# EAGLE board nrf52840_four_input_minew_module_v01 (EAGLE 7.7.0)
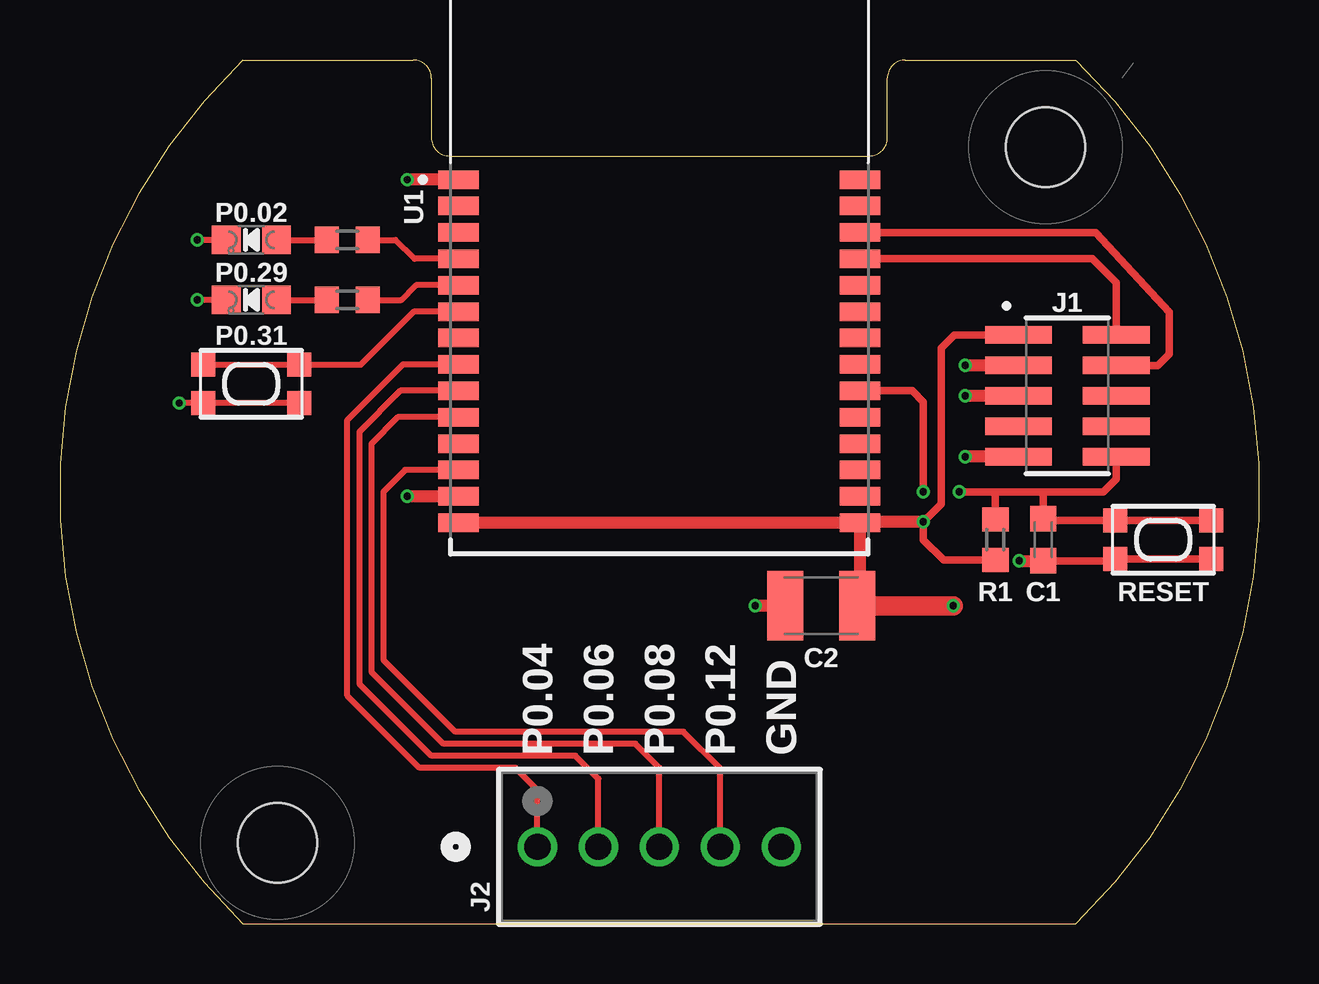
[diagram p0: board, top side]
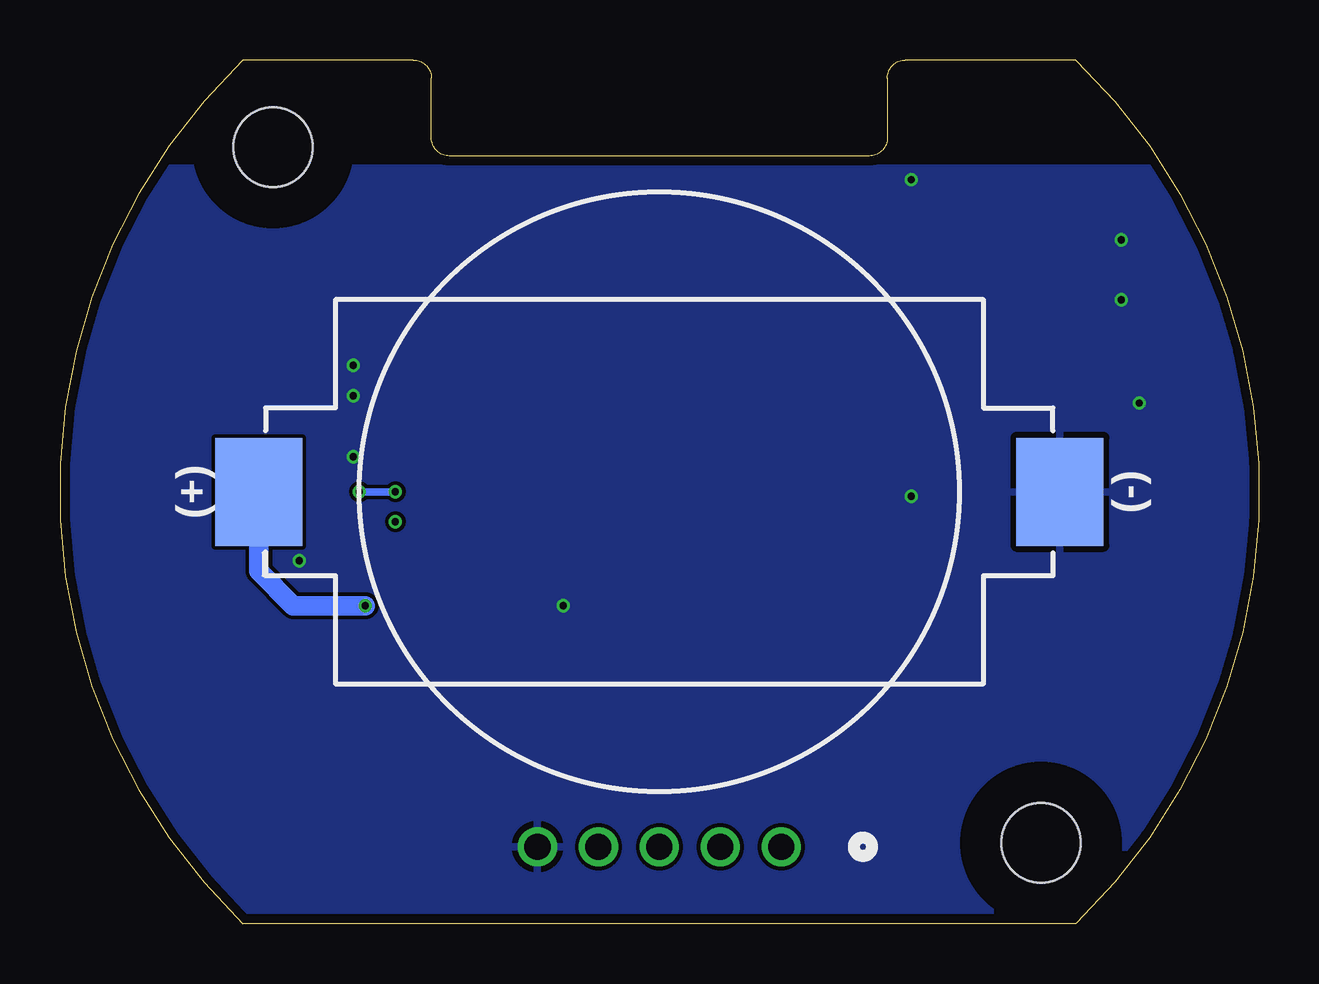
[diagram p1: board, bottom side, seen from below]

Size 49.94 x 36 mm. Coordinates in mm from the lower left corner, seen from the top.
Outline: 7.62,36 14.72,36 arc-90 15.47,35.25 15.47,32.75 arc90 16.22,32 33.72,32 arc90 34.47,32.75 34.47,35.25 arc-90 35.22,36 42.32,36 arc-92 42.32,0 7.62,0 arc-92 7.62,36
Copper layers (1*16): Top 0.035559375mm / dielectric 1.6mm / Bottom 0.035559375mm
Design rules "oshpark-2layer-2018": minimum track width 6mil, minimum drill 10mil, track to track 6mil, track to pad 6mil, pad to pad 6mil, via to via 6mil, smd to smd 6mil, copper to edge 15mil, drill to drill 6mil, minimum pad ring 5mil, minimum via ring 5mil, stop-mask expansion 2.5mil, vias tented up to drill 0mil, thermal gap 10mil
Holes 3.3 mm at 9.07,3.37 41.07,32.37
tRestrict: area 5.9,0.2 to 12.3,6.6; area 37.9,29.2 to 44.3,35.6
bRestrict: area 5.9,0.2 to 12.3,6.6; area 37.9,29.2 to 44.3,35.6

## Footprints (pad centres in the part's own frame; a part is rotated, then mirrored left to right if it is on the bottom)
C0603K = smd 1.05 x 1.08: 1 -0.875,0; 2 0.875,0
C1210K = smd 1.5 x 2.9: 1 -1.5,0; 2 1.5,0
BAT-HLD-008-SMT = smd 3.62 x 4.5: NEG 16.69,0; POS -16.69,0
CHIPLED_0805_NOOUTLINE = smd 1.2 x 1.2: A 0,-1.05; C 0,1.05
SAMTEC_FTS-105-01-F-DV-P-TR = smd 0.74 x 2.79: 01 -2.54,-2.035; 02 -2.54,2.035; 03 -1.27,-2.035; 04 -1.27,2.035; 05 0,-2.035; 06 0,2.035; 07 1.27,-2.035; 08 1.27,2.035; 09 2.54,-2.035; 10 2.54,2.035
CONN_1725685_PXC = drill 1.092 pad 1.6: 1 0,0; 2 2.54,0; 3 5.08,0; 4 7.62,0; 5 10.16,0
R0603 = smd 1 x 1.1: 1 -0.85,0; 2 0.85,0
KMR2 = smd 1 x 1: 1 2,0.8; 2 2,-0.8; 3 -2,0.8; 4 -2,-0.8
XCVR_MS88SF2 = smd 1.69 x 0.77: 1 -8.36,4.01; 2 -8.36,2.91; 3 -8.36,1.81; 4 -8.36,0.71; 5 -8.36,-0.39; 6 -8.36,-1.49; 7 -8.36,-2.59; 8 -8.36,-3.69; 9 -8.36,-4.79; 10 -8.36,-5.89; 11 -8.36,-6.99; 12 -8.36,-8.09; 13 -8.36,-9.19; 14 -8.36,-10.29; 15 8.36,-10.29; 16 8.36,-9.19; 17 8.36,-8.09; 18 8.36,-6.99; 19 8.36,-5.89; 20 8.36,-4.79; 21 8.36,-3.69; 22 8.36,-2.59; 23 8.36,-1.49; 24 8.36,-0.39; 25 8.36,0.71; 26 8.36,1.81; 27 8.36,2.91; 28 8.36,4.01

## Placement (x,y rotation side)
C1  0.1 uF  [C0603K]  40.97,16 270 top
C2  100uF  [C1210K]  31.72,13.25 180 top
CR2450  BAT-HLD-008-SMT  [BAT-HLD-008-SMT]  24.97,18 0 bottom
D1  RED  [CHIPLED_0805_NOOUTLINE]  7.97,26 90 top
D7  RED  [CHIPLED_0805_NOOUTLINE]  7.97,28.5 90 top
J1  FTS-105-01-F-DV-P-TRJ  [SAMTEC_FTS-105-01-F-DV-P-TR]  41.97,22 270 top
J2  1725685  [CONN_1725685_PXC]  19.89,3.2 0 top
R1  100k  [R0603]  38.97,16 270 top
R2  1k  [R0603]  11.97,28.5 0 top
R3  1k  [R0603]  11.97,26 0 top
SW1  KMR211NGLFS  [KMR2]  45.97,16 0 top
SW2  KMR211NGLFS  [KMR2]  7.97,22.5 0 top
U1  MS88SF2  [XCVR_MS88SF2]  24.97,27 0 top

## Library data of the parts
C1 C2 R1-R3 = rcl
CR2450 = BAT-HLD-008-SMT
D1 D7 = microbuilder
J1 = FTS-105-01-F-DV-P-TR; AVAILABILITY: In Stock; DESCRIPTION: FTS - Samtec 1.27mm Micro Header 0.86mm Profile 3.05mm Post; MF: Samtec; MP: FTS-105-01-F-DV-P-TR; PACKAGE: None; PRICE: None; PURCHASE-URL: https://pricing.snapeda.com/search/part/FTS-105-01-F-DV-P-TR/?ref=eda
J2 = PHOENIX-1725685-2.54-1x5; COPYRIGHT: Copyright (C) 2024 Ultra Librarian. All rights reserved.; MANUFACTURER_PART_NUMBER: 1725685; MFR_NAME: Phoenix Contact
SW1 SW2 = adafruit
U1 = MS88SF2; AVAILABILITY: Not in stock; CHECK_PRICES: https://www.snapeda.com/parts/MS88SF2/Minew/view-part/?ref=eda; DESCRIPTION: MS88SF2 is based on Nordic nRF52840 and it is a compact and very small size Bluetooth 5.0 module with the metal cover shield and compliance with IEEE 802.14.4 standard.; MF: Minew; MP: MS88SF2; PACKAGE: Package; PRICE: None; SNAPEDA_LINK: https://www.snapeda.com/parts/MS88SF2/Minew/view-part/?ref=snap

## Nets
!RESET: C1.1 J1.10 R1.1 SW1.1 SW1.3 U1.20
+3V3: C2.1 CR2450.POS J1.01 R1.2 U1.14 U1.15
GND: C1.2 C2.2 CR2450.NEG D1.C D7.C J1.03 J1.05 J1.09 J2.5 SW1.2 SW1.4 SW2.2 SW2.4 U1.1 U1.13
N$2: D7.A R2.1
N$4: D1.A R3.1
P0.02: R2.2 U1.4
P0.04: J2.1 U1.8
P0.06: J2.2 U1.9
P0.08: J2.3 U1.10
P0.12: J2.4 U1.12
P0.29: R3.2 U1.5
P0.31: SW2.1 SW2.3 U1.6
SWCLK: J1.04 U1.26
SWDIO: J1.02 U1.25

## Tracks (layer width: path | path; a pad name or v marks a point on that pad's centre or on a via)
!RESET  (via drill 0.3)
  Top 0.305: U1.20 35.51,22.21 35.97,21.75 v35.97,18 | v37.47,18 38.97,18 | 38.97,18 40.97,18 | R1.1 38.97,18 | 40.97,18 C1.1 41.05,16.8 SW1.3 SW1.1 | 40.97,18 43.47,18 44.01,18.54 J1.10
  Bottom 0.305: v35.97,18 v37.47,18
+3V3  (via drill 0.3)
  Top 0.305: J1.01 37.26,24.54 36.72,24 36.72,17.5 v35.97,16.75 35.97,16 36.82,15.15 R1.2
  Top 0.508: U1.14 U1.15 | v35.97,16.75 33.37,16.75 U1.15 | U1.15 33.33,13.36 C2.1
  Top 0.813: v37.22,13.25 C2.1
  Bottom 0.813: CR2450.POS 41.66,14.69 40.22,13.25 v37.22,13.25
GND  (via drill 0.3)
  Top 0.254: D7.C v5.72,28.5 | D1.C v5.72,26 | v4.97,21.7 SW2.4 SW2.2
  Top 0.305: SW1.2 SW1.4 43.9,15.12 C1.2
  Top 0.508: U1.13 v14.47,17.81 | U1.1 v14.47,31.01 | J1.03 v37.72,23.27 | J1.05 v37.72,22 | J1.09 v37.72,19.46 | C2.2 v28.97,13.25 | v39.97,15.12 C1.2
  pour Bottom (isolate 0.152): 3.97,31.5 arc79 7.62,0 42.32,0 arc79 45.97,31.5
N$2
  Top 0.254: D7.A R2.1
N$4
  Top 0.254: D1.A R3.1
P0.02
  Top 0.254: U1.4 14.76,27.71 13.97,28.5 R2.2
P0.04
  Top 0.254: J2.1 19.89,5.58 18.97,6.5 14.97,6.5 11.97,9.5 11.97,21 14.28,23.31 U1.8
P0.06
  Top 0.254: J2.2 22.43,6.04 21.47,7 15.47,7 12.47,10 12.47,20.5 14.18,22.21 U1.9
P0.08
  Top 0.254: J2.3 24.97,6.5 23.97,7.5 15.97,7.5 12.97,10.5 12.97,20 14.08,21.11 U1.10
P0.12
  Top 0.254: J2.4 27.51,6.46 25.97,8 16.47,8 13.47,11 13.47,18 14.38,18.91 U1.12
P0.29
  Top 0.254: U1.5 14.83,26.61 14.22,26 R3.2
P0.31
  Top 0.254: U1.6 14.73,25.51 12.52,23.3 SW2.1 SW2.3
SWCLK
  Top 0.305: J1.04 45.74,23.27 46.22,23.75 46.22,25.5 43.16,28.81 U1.26
SWDIO
  Top 0.305: U1.25 43.01,27.71 44.01,26.71 J1.02

## Text on the board
tNames: P0.02 | P0.29 | P0.04 | P0.06 | P0.08 | P0.12 | GND
tDocu: 3.3mm hole for loose fit M3 / hex nut keepout: / 5.5mm short diag = 6.35mm long diag / keep out = 3.2mm radius / screw keepout: / 5.7mm diameter = 2.9mm radius
_tsilk: P0.02 | U1 | P0.29 | J1 | P0.31 | R1 | C1 | RESET | C2 | P0.04 | P0.06 | P0.08 | P0.12 | GND | J2
_bsilk: (-) | (+)